# Altium PCB WallPhish.PcbDoc
Units mil, origin at the board's own origin, x right, y up, seen from the top; angles counter-clockwise.
Board outline 3000 x 1290.16 mil, 2 copper layers (Top Layer, Bottom Layer); 10 components, 7 nets, 39 pads, 5 vias.
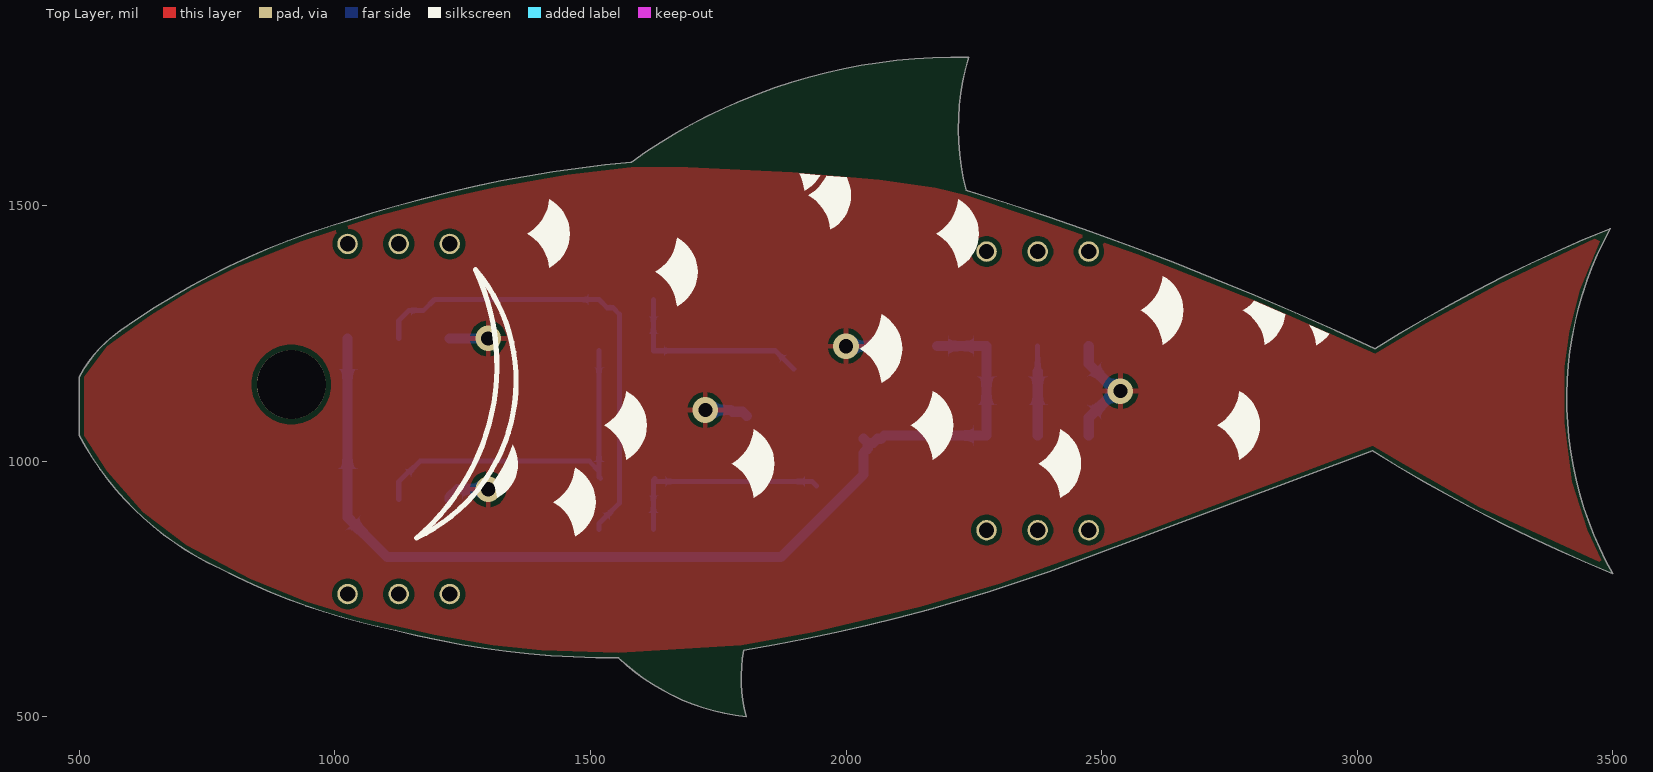
[diagram p0: Top Layer view]
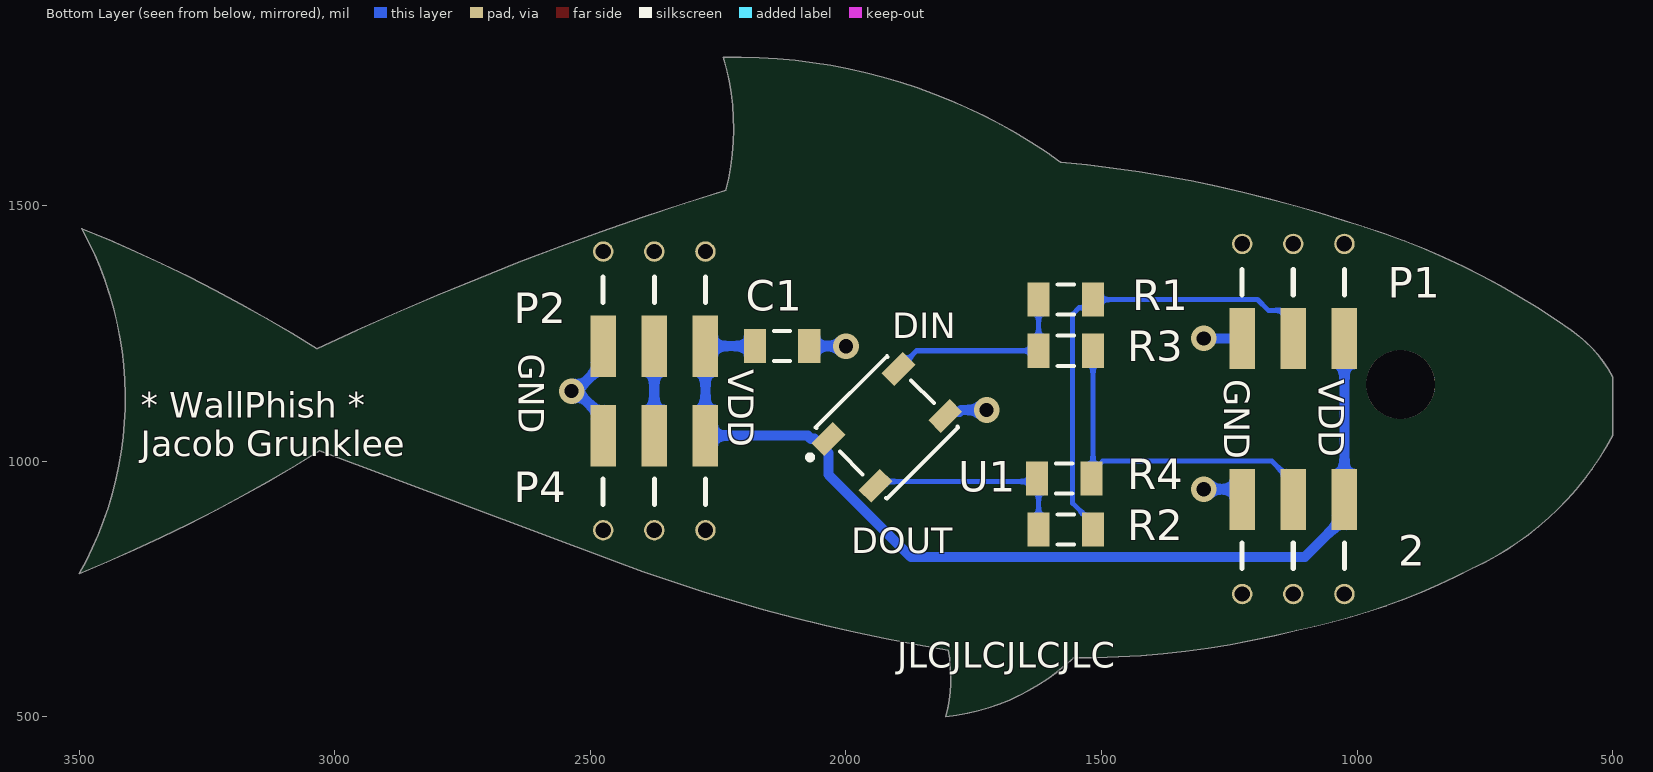
[diagram p1: Bottom Layer view, seen from below]

## Layer stack, top to bottom
Top Solder: solder mask 0.4, Solder Resist, Dk 3.5
Top Layer: signal copper 1.4
Dielectric 1: dielectric 12.6, FR-4, Dk 4.8
Bottom Layer: signal copper 1.4
Bottom Solder: solder mask 0.4, Solder Resist, Dk 3.5

## Board outline
775,790 ccw(c1386.08,1974.18) 1118.79,668.71 ccw(c1548.63,2361.52) 1555,615 ccw(c1850.65,928.47) 1805,500 cw(c2086.45,575.92) 1800,630 ccw(c1237.33,4049.27) 2455,805 3030,1020 ccw(c4678.56,3668.22) 3500,780 cw(c4104.77,1122) 3495,1455 ccw(c4613.21,-1301.55) 3035,1220 ccw(c384.12,-4433.73) 2235,1530 cw(c2708.48,1650.94) 2240,1790 ccw(c2217.5,697.5) 1580,1585 ccw(c1815.5,-948.3) 1025,1470 ccw(c1426.83,70.29) 580,1255 ccw(c729.27,1041.76) 500,1165 500,1050 ccw(c1025.25,1330.12)

## Design rules (kind name [scope] priority, off if disabled: settings)
Clearance [All] p1: gap=10 ignorepadtopadclearanceinfootprint=FALSE except(0: Arc-Hole Track-Hole SMDPad-Hole THPad-Hole Via-Hole Fill-Hole Poly-Hole Region-Hole Text-Hole)
HoleSize [All] p1: absolutevalues=TRUE maxlimit=200 minlimit=1 maxpercent=80.000 minpercent=20.000
MinimumSolderMaskSliver [All] p1: minsoldermaskwidth=9
PolygonConnect [All] p1: connectstyle=Relief reliefconductorwidth=10 reliefentries=4 polygonreliefangle="90 Angle" airgapwidth=10
RoutingVias [All] p1: holewidth=28 width=50 viastyle="Through Hole" minholewidth=28 minwidth=50 maxholewidth=28 maxwidth=50
SilkToSolderMaskClearance [IsPad] p1: minsilkscreentomaskgap=9 clearancetoexposedcopper=TRUE
SolderMaskExpansion [All] p1: expansion=4 istentingtop=FALSE
Width [All] p1: maxlimit=20 minlimit=10 preferedwidth=20
27 further rules are at their usual default settings.

## Classes and differential pairs
component class WallPhish: C1 R1 R2 R3 R4

## Components (designator, comment, footprint, x,y, rotation, side; value= is the part's Value field where it differs from the comment)
2 "Port" Port-3wire 1025,740 r270 bottom (schematic designator P3)
C1 "Cap Semi" C1206 2125,1225 r0 bottom value=100nF
P1 "Port" Port-3wire 1225,1425 r90 bottom
P2 "Port" Port-3wire 2475,1410 r90 bottom
P4 "Port" Port-3wire 2275,865 r270 bottom
R1 "Res1" C1206 1570,1316 r0 bottom value=0R
R2 "Res1" C1206 1570,866 r0 bottom value=0R
R3 "Res1" C1206 1570,1216 r0 bottom value=0R
R4 "Res1" C1206 1573.15,966 r0 bottom value=0R
U1 "1655" ADA-RGB-1655_V 1920,1066 r135 bottom

## Footprints (in the part's own frame and the unit in brackets; to place one, negate y for a bottom-side part, rotate by r counter-clockwise, add the part's x,y. Pads: shape width x height; smd on the part's side, far side on the other; paste and mask are expansions set on the pad)
ADA-RGB-1655_V [mm] "SMD, 4-Leads, Body 5x5mm"
  rect 1.5x0.9 smd: 1(-2.45,1.65) 2(-2.45,-1.65) 3(2.45,-1.65) 4(2.45,1.65)
  silkscreen extent -3.87,-2.5 2.5,2.5, body extent -2.7,-2.5 2.7,2.5, height 1.68
C1206 [mm] "Chip Capacitor, Body 3.2x1.6mm, IPC High Density"
  rect 1.1x1.7 smd: 1(-1.35,0) 2(1.35,0)
  silkscreen extent -0.4,-0.75 0.4,0.75, body extent -1.7,-0.9 1.7,0.9, height 1.3
Port-3wire [mil]
  rect 120x50 smd: 1(-185,0) 2(-185,-100) 3(-185,-200)
  round 40 hole 30 unplated: NC(0,-200) NC(0,-100) NC(0,0)
  silkscreen extent -100,-200 -50,0

## Part data
2 P1 P2 P4: "3-wire port"
C1: "Capacitor (Semiconductor SIM Model)", LatestRevisionDate=29-May-2009, LatestRevisionNote="IPC-7351 Footprint Added.", PackageDescription="Chip Capacitor", PackageReference=C1206, Published=8-Jun-2000, Publisher="Altium Limited"
R1 R2 R3 R4: "Resistor", LatestRevisionDate=17-Jul-2002, LatestRevisionNote="Re-released for DXP Platform.", PackageDescription="Axial Device, Thru-Hole; 2 Leads; 0.3 in Pin Spacing", PackageReference=AXIAL-0.3, Published=8-Jun-2000, Publisher="Altium Limited"
U1: library part CMP-2000-05026-1, "Intelligent Control LED Integrated Light Source, 3.5 to 5.3 V, -25 to 80 degC, 4-Pin SMD, RoHS, Tape and Reel", Color=Red,Green,Blue(RGB), Manufacturer=Adafruit-Industries-LLC, Package Description="4-Pin Surface Mount Device, Body 5 x 5 mm", Category=Optoelectronics, Configuration=Discrete, Controller Type=-, Datasheet URL=http://datasheet.octopart.com/ADA1655-Adafruit-Industries-datasheet-32028139.pdf, Datasheet Version=May-13, Family=Addressable,Specialty, Interface=-, Manufacturer URL=https://www.adafruit.com/, Mounting Type=SurfaceMount, Number of LEDs=10, Package Reference=1655, Series=Neopixel, Size / Dimension=5.00mmLx5.00mmW, Utilized LED=WS2812(5050)

## Free pads (board coordinates)
  round 135 hole 135 unplated: I(915,1150)

## Via types
v1: diameter 50, hole 28, Top Layer to Bottom Layer, 5 vias

## Nets (pads, with @x,y where several pads share a name; then routed paths per layer and width w, separated by ;. In a path a pad name is that pad's centre, name@x,y a point inside that pad or via, vN(x,y) a via of type N, cw(c..) or ccw(c..) an arc to the next point about the centre after c; other vN are vias at no path point)
DBOT: 2.2 R3.1 R4.1 | length 702.6
  Bottom Layer w10: 2.2 1125,960 1145,980 1146.72,980 1166.72,1000 1497.81,1000 R4.1@1516.85,980.96 ; R3.1 R4.1@1516.85,980.96 ; R4.1 1516.85,969.15 R4.1@1516.85,980.96
DIN: R1.2 R3.2 U1.4 | length 389.4
  Bottom Layer w10: R1.2 R3.2 1861.87,1216 U1.4
DOUT: R2.2 R4.2 U1.2 | length 425
  Bottom Layer w10: R2.2 R4.2@1623.15,962.85 ; R4.2 R4.2@1623.15,962.85 ; U1.2 1933.92,960.21 1625.79,960.21 R4.2@1623.15,962.85
DTHRU: P2.2 P4.2 | length 175
  Bottom Layer w10: P2.2@2375,1175 P2.2
  Bottom Layer w20: P4.2 P2.2@2375,1175
DTOP: P1.2 R1.1 R2.1 | length 933.4
  Bottom Layer w10: P1.2 1125,1275 1145,1295 1173.79,1295 1194.79,1316 R1.1 1532.85,1300 1544.14,1300 1556.65,1287.49 1556.65,917.61 1516.85,877.81 R2.1
GND: 2.3 C1.1 P1.1 P2.1 P4.3 U1.3 | length 556.1
  Bottom Layer w20: 2.3 1225,930 1240,945 v1(1300,945) ; P1.1 v1(1300,1240) ; v1(1725,1100) 1775,1100 1778.38,1096.62 1797.51,1096.62 U1.3 ; v1(2000,1225) C1.1 ; P4.3 2475,1085 2521.39,1131.39 2531.15,1131.39 v1(2536.89,1137.13) 2531.15,1142.87 2522.13,1142.87 2475,1190 P2.1
VDD: 2.1 C1.2 P1.3 P2.3 P4.1 U1.1 | length 2045.4
  Bottom Layer w20: P1.3 2.1 1025,890 1040,875 1102.46,812.54 1872.99,812.54 2034.14,973.69 2034.14,1016.11 2042.49,1024.46 U1.1@2042.49,1035.38 ; U1.1 U1.1@2042.49,1035.38 ; C1.2 P2.3 P4.1 2075,1050 2068.73,1043.73 2061.76,1043.73 2053.4,1035.38 U1.1@2042.49,1035.38
pads on no net: 2.NC P1.NC P2.NC P4.NC

## Polygon pours and split planes (outlines as drawn)
GND on Top Layer "GND_L01_P001" (solid, pour order 1): 1580,1575 1690,1575 1895,1565 2065,1550 2175,1535 2235,1520 2355,1480 2570,1405 2810,1310 3035,1210 3135,1270 3275,1345 3400,1405 3465,1435 3475,1430 3435,1335 3415,1255 3405,1185 3405,1075 3420,960 3450,865 3480,800 3240,910 3090,995 3030,1030 2565,855 2300,760 2145,715 1935,665 1795,640 1555,625 1405,630 1310,640 1195,660 1045,695 945,725 835,770 710,835 625,900 555,980 510,1050 510,1165 555,1225 590,1250 640,1285 720,1335 810,1380 935,1430 1085,1480 1200,1510 1310,1535 1455,1560

## Silkscreen, mask and mechanical layers (free items; w line width, h text height)
Top Overlay:
  region: 1309.83,957.61 ccw(c1017.52,1156.04) 1348.36,1032.08 cw(c1281.89,995) 1318,928 ccw(c1232.26,920.27)
  region: 2176.6,1445.15 ccw(c2135.02,1519.14) 2219.6,1512.15 cw(c2183.49,1445.15) 2219.6,1378.15 ccw(c2135.02,1371.16)
  region: 2126.6,1070.15 ccw(c2085.02,1144.14) 2169.6,1137.15 cw(c2133.49,1070.15) 2169.6,1003.15 ccw(c2085.02,996.16)
  region: 1427,920 ccw(c1385.42,993.99) 1470,987 cw(c1433.89,920) 1470,853 ccw(c1385.42,846.01)
  region: 1969.6,1453.15 ccw(c1885.02,1446.16) 1926.6,1520.15 ccw(c1883.86,1594.88) 1961.87,1558.46 2001.14,1555.04 cw(c1933.49,1520.15)
  region: 2920,1227 ccw(c2835.42,1220.01) 2906.21,1266.82 2945.55,1249.39 cw(c2883.89,1294)
  region: 2776.6,1295.15 cw(c2735.02,1221.16) 2819.6,1228.15 ccw(c2783.49,1295.15) 2859.24,1287.68 2799.07,1313.67 cw(c2733.86,1369.88)
  region: 2726.6,1070.15 ccw(c2685.02,1144.14) 2769.6,1137.15 cw(c2733.49,1070.15) 2769.6,1003.15 ccw(c2685.02,996.16)
  region: 2576.6,1295.15 ccw(c2535.02,1369.14) 2619.6,1362.15 cw(c2583.49,1295.15) 2619.6,1228.15 ccw(c2535.02,1221.16)
  region: 2376.6,995.15 ccw(c2335.02,1069.14) 2419.6,1062.15 cw(c2383.49,995.15) 2419.6,928.15 ccw(c2335.02,921.16)
  region: 2026.6,1220.15 ccw(c1985.02,1294.14) 2069.6,1287.15 cw(c2033.49,1220.15) 2069.6,1153.15 ccw(c1985.02,1146.16)
  region: 1919,1529 ccw(c1834.42,1522.01) 1908.61,1563.23 1949.65,1559.45 cw(c1882.89,1596)
  region: 1776.5,995.09 ccw(c1734.91,1069.07) 1819.5,1062.09 cw(c1783.38,995.09) 1819.5,928.09 ccw(c1734.91,921.1)
  region: 1527,1070 ccw(c1485.42,1143.99) 1570,1137 cw(c1533.89,1070) 1570,1003 ccw(c1485.42,996.01)
  region: 1626.6,1370.15 ccw(c1585.02,1444.14) 1669.6,1437.15 cw(c1633.49,1370.15) 1669.6,1303.15 ccw(c1585.02,1296.16)
  region: 1376.6,1445.15 ccw(c1335.02,1519.14) 1419.6,1512.15 cw(c1383.49,1445.15) 1419.6,1378.15 ccw(c1335.02,1371.16)
  lines w10: 1160,850 ccw(c1016,1156.64) 1275,1375 cw(c876.41,1187.21) 1160,850
Bottom Overlay:
  text "DIN" at 1910,1240.02 h50
  text "GND" at 2639.98,1210 h50 r90
  text "VDD" at 2229.98,1180 h50 r90
  text "VDD" at 1074.98,1160 h50 r90
  text "GND" at 1259.98,1160 h50 r90
  text "* WallPhish * / Jacob Grunklee" at 3380,1010 h50
  text "DOUT" at 1990,820.02 h50
  text "JLCJLCJLCJLC" at 1900,596.04 h50
Top Solder:
  drawing of 174 lines, arcs and shapes, not listed
Mechanical 1:
  lines w10: 500,500 3500,500 3500,1800 500,1800 500,500
Mechanical 13:
  the board outline again, w10
Mechanical 15:
  region: 2063 vertices and 2 holes, not listed, extent 500,500 3500,1791.01